# EAGLE board usb-sanitizer-double (EAGLE 7.2.0)
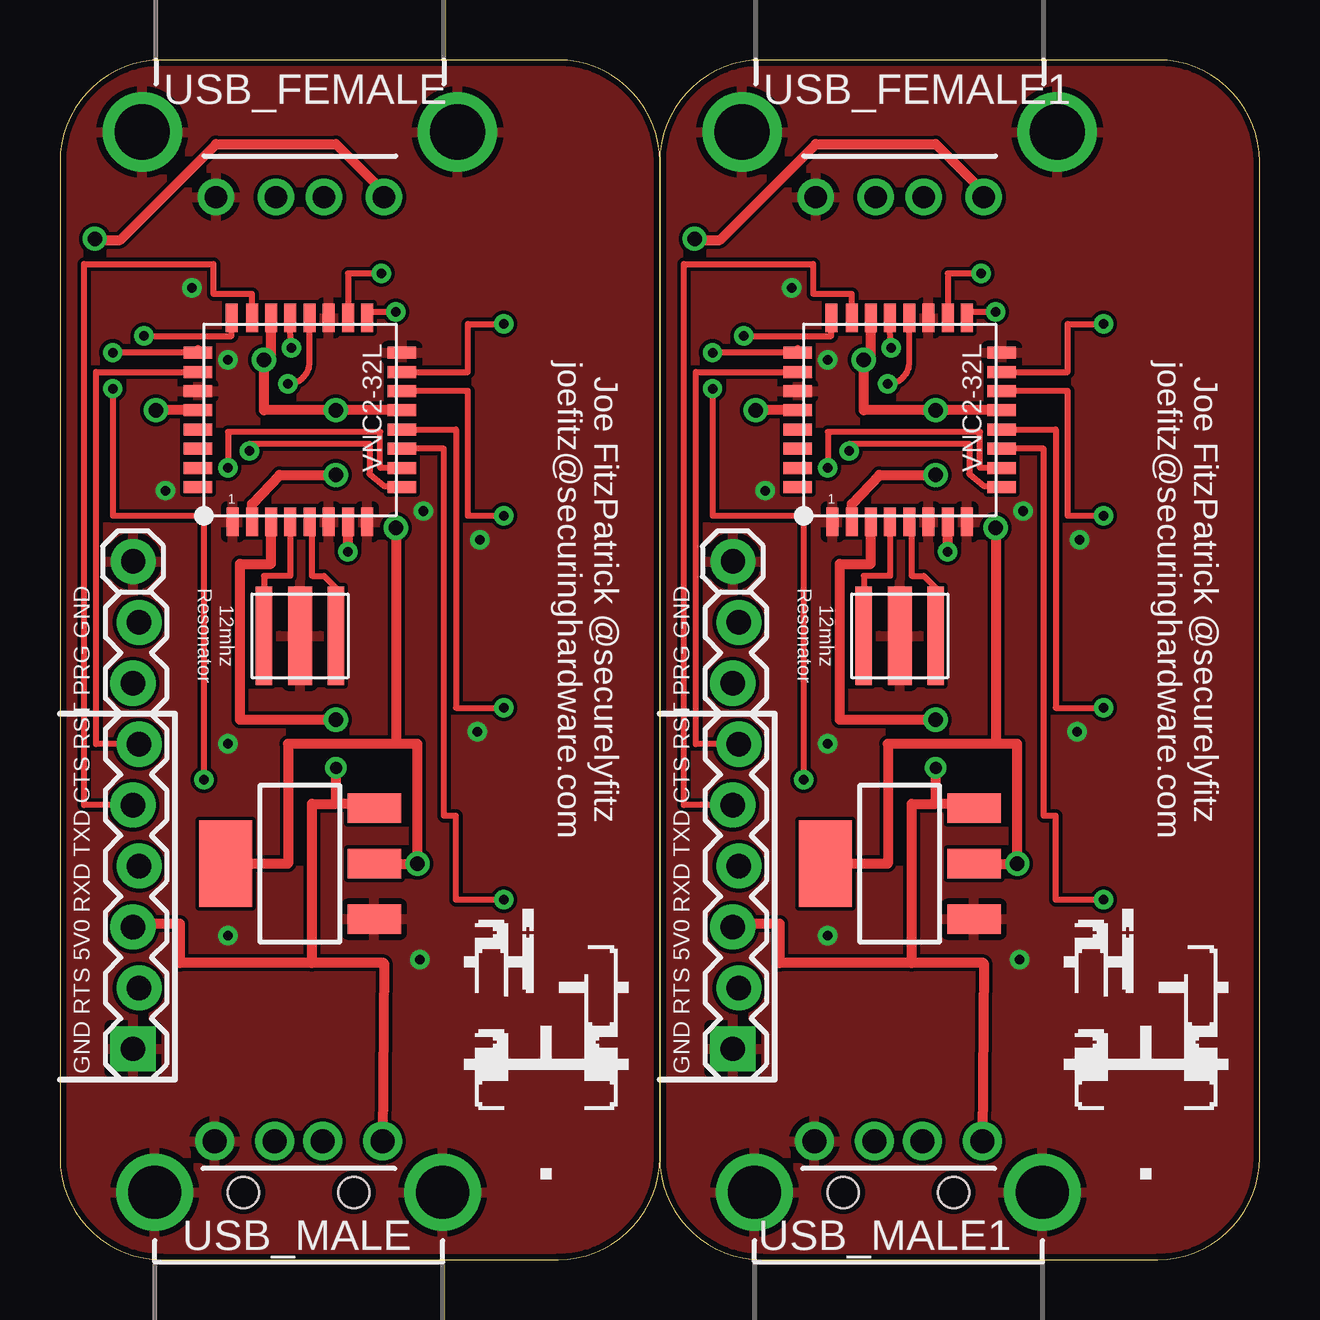
[diagram p0: board, top side]
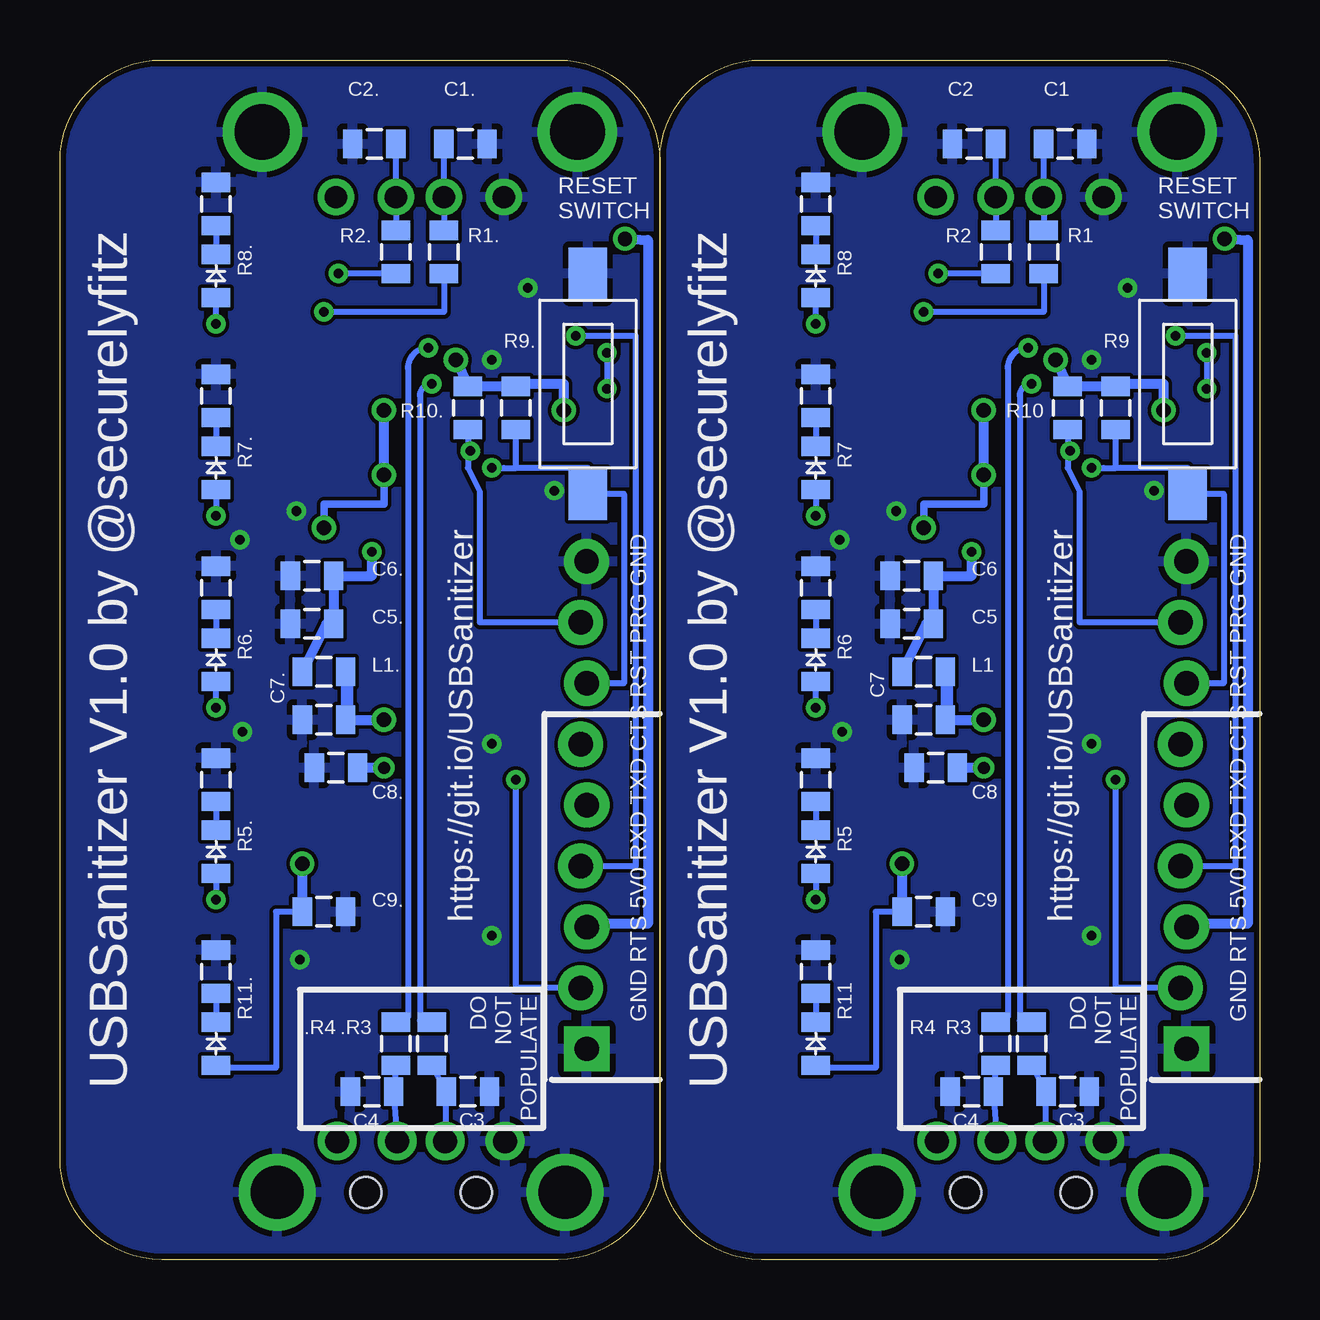
[diagram p1: board, bottom side, seen from below]

Size 50 x 50 mm. Coordinates in mm from the lower left corner, seen from the top.
Outline: 25,4.24 arc-90 20.76,0 4.24,0 arc-90 0,4.24 0,45.76 arc-90 4.24,50 20.76,50 arc-90 25,45.76
Outline: 25,4.24 25,45.76
Outline: 25,45.76 25,4.24
Outline: 25,4.24 arc90 29.24,0 45.76,0 arc90 50,4.24 50,45.76 arc90 45.76,50 29.24,50 arc90 25,45.76
Copper layers (1*16): Top 0.035mm / dielectric 1.5mm / Bottom 0.035mm
Design rules "DFRobot_Eagle_Rule_v0.4 *": minimum track width 6mil, minimum drill 12mil, track to track 6mil, track to pad 6mil, pad to pad 6mil, via to via 6mil, smd to smd 0mil, copper to edge 10mil, drill to drill 10mil, minimum pad ring 12mil, minimum via ring 8mil, stop-mask expansion 2mil, vias tented up to drill 25mil, thermal gap 10mil

## Footprints (pad centres in the part's own frame; a part is rotated, then mirrored left to right if it is on the bottom)
0805 = smd 0.8 x 1.2: 1 -0.9,0; 2 0.9,0
SOT223 = smd 1.219 x 2.235: 1 -2.311,-3.099; 2 0,-3.099; 3 2.311,-3.099 | smd 3.6 x 2.2: 4 0,3.099
1X08_LOCK = drill 1.016 pad 1.88 square: 1 0,0.127 | drill 1.016 pad 1.88: 2 2.54,-0.127; 3 5.08,0.127; 4 7.62,-0.127; 5 10.16,0.127; 6 12.7,-0.127; 7 15.24,0.127; 8 17.78,-0.127
1X01 = drill 1.016 pad 1.88: 1 0,0
QFP32 = smd 0.5 x 1.2: P$1 -2.8,-4.25; P$2 -2,-4.25; P$3 -1.2,-4.25; P$4 -0.4,-4.25; P$5 0.4,-4.25; P$6 1.2,-4.25; P$7 2,-4.25; P$8 2.8,-4.25; P$17 2.8,4.25; P$18 2,4.25; P$19 1.2,4.25; P$20 0.4,4.25; P$21 -0.4,4.25; P$22 -1.2,4.25; P$23 -2,4.25; P$24 -2.85,4.25 | smd 1.2 x 0.5: P$9 4.25,-2.8; P$10 4.25,-2; P$11 4.25,-1.2; P$12 4.25,-0.4; P$13 4.25,0.4; P$14 4.25,1.2; P$15 4.25,2; P$16 4.25,2.8; P$25 -4.25,2.8; P$26 -4.25,2; P$27 -4.25,1.2; P$28 -4.25,0.4; P$29 -4.25,-0.4; P$30 -4.25,-1.2; P$31 -4.25,-2; P$32 -4.25,-2.8
RESONATOR = smd 1 x 4.1: GND 0,0 | smd 0.7 x 4.1: XIN -1.5,0; XOUT 1.5,0
SWITCH = smd 2.18 x 1.6: P$1 -4.59,0; P$2 4.59,0
USB-A-F = drill 0.92: D+ 2.71,-1; D- 2.71,1; GND 2.71,-3.5; VBUS 2.71,3.5 | drill 2.3: GND2 0,-6.57; GND3 0,6.57
USB-A-M = drill 1: D+ 2.13,1; D- 2.13,-1; GND 2.13,3.5; VBUS 2.13,-3.5 | drill 2.2: GND2 0,-6; GND3 0,6 | hole 1.3: 0,2.3; 0,-2.3

## Placement (x,y rotation side)
.C3  47pF  [0805]  33,7 0 bottom
.C4  47pF  [0805]  37,7 180 bottom
.R3  27  [0805]  34.5,9 270 bottom
.R4  27  [0805]  36,9 270 bottom
C1  47pF  [0805]  8.1,46.5 0 bottom
C1.  47pF  [0805]  33.1,46.5 0 bottom
C2  47pF  [0805]  11.9,46.5 180 bottom
C2.  47pF  [0805]  36.9,46.5 180 bottom
C3  47pF  [0805]  8,7 0 bottom
C4  47pF  [0805]  12,7 180 bottom
C5  4.7uF  [0805]  14.5,26.5 180 bottom
C5.  4.7uF  [0805]  39.5,26.5 180 bottom
C6  100nF  [0805]  14.5,28.5 180 bottom
C6.  100nF  [0805]  39.5,28.5 180 bottom
C7  100nF  [0805]  14,22.5 180 bottom
C7.  100nF  [0805]  39,22.5 180 bottom
C8  10uF  [0805]  13.5,20.5 180 bottom
C8.  10uF  [0805]  38.5,20.5 180 bottom
C9  22uF  [0805]  14,14.5 0 bottom
C9.  22uF  [0805]  39,14.5 0 bottom
D1  READY  [0805]  18.5,17 90 bottom
D2  ERASE  [0805]  18.5,25 90 bottom
D3  GOOD  [0805]  18.5,33 90 bottom
D4  BAD  [0805]  18.5,41 90 bottom
D5  POWER  [0805]  18.5,9 90 bottom
D6  READY  [0805]  43.5,17 90 bottom
D7  ERASE  [0805]  43.5,25 90 bottom
D8  GOOD  [0805]  43.5,33 90 bottom
D9  BAD  [0805]  43.5,41 90 bottom
D10  POWER  [0805]  43.5,9 90 bottom
IC1  1117-33  [SOT223]  10,16.5 90 top
IC2  1117-33  [SOT223]  35,16.5 90 top
JP1  PROG  [1X08_LOCK]  3.17,8.78 90 top
JP2  GNDCON  [1X01]  3.05,29.1 0 top
JP3  PROG  [1X08_LOCK]  28.17,8.78 90 top
JP4  GNDCON  [1X01]  28.05,29.1 0 top
L1  600R  [0805]  14,24.5 180 bottom
L1.  600R  [0805]  39,24.5 180 bottom
R1  27  [0805]  9,42 90 bottom
R1.  27  [0805]  34,42 90 bottom
R2  27  [0805]  11,42 90 bottom
R2.  27  [0805]  36,42 90 bottom
R3  27  [0805]  9.5,9 270 bottom
R4  27  [0805]  11,9 270 bottom
R5  100  [0805]  18.5,20 90 bottom
R5.  100  [0805]  43.5,20 90 bottom
R6  100  [0805]  18.5,28 90 bottom
R6.  100  [0805]  43.5,28 90 bottom
R7  100  [0805]  18.5,36 90 bottom
R7.  100  [0805]  43.5,36 90 bottom
R8  100  [0805]  18.5,44 90 bottom
R8.  100  [0805]  43.5,44 90 bottom
R9  47k  [0805]  6,35.5 270 bottom
R9.  47k  [0805]  31,35.5 270 bottom
R10  47k  [0805]  8,35.5 270 bottom
R10.  47k  [0805]  33,35.5 270 bottom
R11  100  [0805]  18.5,12 90 bottom
R11.  100  [0805]  43.5,12 90 bottom
U$1  VNC2  [QFP32]  10,35 0 top
U$2  [SH-HALFINCH]  16,15 270 top
U$3  [OSHW]  18.5,47 270 top
U$4  RESONATOR  [RESONATOR]  10,26 0 top
U$5  SWITCH  [SWITCH]  3,36.5 90 bottom
U$6  VNC2  [QFP32]  35,35 0 top
U$7  RESONATOR  [RESONATOR]  35,26 0 top
U$8  [SH-HALFINCH]  41,15 270 top
U$9  [OSHW]  43.5,47 270 top
U$10  SWITCH  [SWITCH]  28,36.5 90 bottom
USB_FEMALE  USB_AF  [USB-A-F]  10,47 270 top
USB_FEMALE1  USB_AF  [USB-A-F]  35,47 270 top
USB_MALE  USB_AM  [USB-A-M]  9.95,2.8 90 top
USB_MALE1  USB_AM  [USB-A-M]  34.95,2.8 90 top

## Library data of the parts
.C3 .C4 .R3 .R4 C1 C1. C2 C2. C3-C5 C5. C6 C6. C7 C7. C8 C8. C9 C9. L1 L1. R1 R1. R2 R2. R3-R5 R5. R6 R6. R7 R7. R8 R8. R9 R9. R10 R10. R11 R11. = SparkFun-Passives
D1-D10 U$1 U$4-U$7 U$10 USB_FEMALE USB_FEMALE1 USB_MALE USB_MALE1 = vinivulum
IC1 IC2 = SparkFun-PowerIC; PROD_ID: VREG-08170
JP1-JP4 = SparkFun-Connectors
U$2 U$8 = securinghardware
U$3 U$9 = oshw

## Nets
3.3V: C9.1 D5.1 IC1.2 IC1.4 R9.1 R10.1 U$1.P$2 U$1.P$13 U$1.P$22 U$1.P$28
3.3V1: C9..1 D10.1 IC2.2 IC2.4 R9..1 R10..1 U$6.P$2 U$6.P$13 U$6.P$22 U$6.P$28
5V: C8.1 IC1.3 JP1.3 USB_FEMALE.VBUS USB_MALE.VBUS
5V1: C8..1 IC2.3 JP3.3 USB_FEMALE1.VBUS USB_MALE1.VBUS
GND: C1.2 C2.2 C3.2 C4.2 C5.2 C6.2 C7.2 C8.2 C9.2 IC1.1 JP1.1 JP2.1 R5.2 R6.2 R7.2 R8.2 R11.2 U$1.P$1 U$1.P$6 U$1.P$8 U$1.P$16 U$1.P$19 U$1.P$27 U$4.GND U$5.P$2 USB_FEMALE.GND USB_FEMALE.GND2 USB_FEMALE.GND3 USB_MALE.GND USB_MALE.GND2 USB_MALE.GND3
GND1: .C3.2 .C4.2 C1..2 C2..2 C5..2 C6..2 C7..2 C8..2 C9..2 IC2.1 JP3.1 JP4.1 R5..2 R6..2 R7..2 R8..2 R11..2 U$6.P$1 U$6.P$6 U$6.P$8 U$6.P$16 U$6.P$19 U$6.P$27 U$7.GND U$10.P$2 USB_FEMALE1.GND USB_FEMALE1.GND2 USB_FEMALE1.GND3 USB_MALE1.GND USB_MALE1.GND2 USB_MALE1.GND3
N$1: C5..1 C6..1 L1..2 U$6.P$7
N$2: C7..1 L1..1 U$6.P$3
N$3: U$6.P$5 U$7.XOUT
N$4: U$6.P$4 U$7.XIN
N$5: JP3.2 U$6.P$25
N$6: JP3.4 U$6.P$24
N$7: JP3.5 U$6.P$23
N$8: JP3.6 U$6.P$26
N$9: D5.2 R11.1
N$10: C5.1 C6.1 L1.2 U$1.P$7
N$11: C7.1 L1.1 U$1.P$3
N$12: JP3.8 R10..2 U$6.P$9
N$13: U$1.P$5 U$4.XOUT
N$14: U$1.P$4 U$4.XIN
N$15: JP1.2 U$1.P$25
N$16: JP1.4 U$1.P$24
N$17: JP1.5 U$1.P$23
N$18: JP1.6 U$1.P$26
N$19: JP3.7 R9..2 U$6.P$10 U$10.P$1
N$20: JP1.8 R10.2 U$1.P$9
N$21: JP1.7 R9.2 U$1.P$10 U$5.P$1
N$22: D1.2 R5.1
N$23: D2.2 R6.1
N$24: D4.2 R8.1
N$25: D3.2 R7.1
N$26: D1.1 U$1.P$11
N$27: D2.1 U$1.P$12
N$28: D3.1 U$1.P$14
N$29: D4.1 U$1.P$15
N$30: D6.2 R5..1
N$31: D7.2 R6..1
N$32: D9.2 R8..1
N$33: D8.2 R7..1
N$34: D6.1 U$6.P$11
N$35: D7.1 U$6.P$12
N$36: D8.1 U$6.P$14
N$37: D9.1 U$6.P$15
N$38: D10.2 R11..1
USB1DM: R2.1 U$1.P$18
USB1DM1: R2..1 U$6.P$18
USB1DP: R1.1 U$1.P$17
USB1DP1: R1..1 U$6.P$17
USB1RDM: C2.1 R2.2 USB_FEMALE.D-
USB1RDM1: C2..1 R2..2 USB_FEMALE1.D-
USB1RDP: C1.1 R1.2 USB_FEMALE.D+
USB1RDP1: C1..1 R1..2 USB_FEMALE1.D+
USB2DM: R4.1 U$1.P$21
USB2DM1: .R4.1 U$6.P$21
USB2DP: R3.1 U$1.P$20
USB2DP1: .R3.1 U$6.P$20
USB2RDM: C4.1 R4.2 USB_MALE.D-
USB2RDM1: .C4.1 .R4.2 USB_MALE1.D-
USB2RDP: C3.1 R3.2 USB_MALE.D+
USB2RDP1: .C3.1 .R3.2 USB_MALE1.D+

## Tracks (layer width: path | path; a pad name or v marks a point on that pad's centre or on a via)
3.3V  (via drill 0.6)
  Top 0.406: U$1.P$13 v11.5,35.4 8.5,35.4 v8.5,37.5 8.8,37.5 U$1.P$22 | U$1.P$28 v4,35.4 | v14,30.5 14,21.5 | 14,21.5 9.5,21.5 9.5,16.5 IC1.4 | IC1.2 v14.9,16.5 14.9,21.5 14,21.5 | U$1.P$2 8,31.5 9.15,32.7 v11.5,32.7
  Bottom 0.254: C9.1 16,14.5 16,8 18.5,8 D5.1
  Bottom 0.305: v14,30.5 14,31.5 11.5,31.5 v11.5,32.7
  Bottom 0.406: v14.9,16.5 C9.1 | v8.5,37.5 R10.1 R9.1 6,36.5 4,36.5 v4,35.4 | v11.5,32.7 v11.5,35.4
3.3V1  (via drill 0.6)
  Top 0.406: U$6.P$13 v36.5,35.4 33.5,35.4 v33.5,37.5 33.8,37.5 U$6.P$22 | U$6.P$28 v29,35.4 | v39,30.5 39,21.5 | 39,21.5 34.5,21.5 34.5,16.5 IC2.4 | IC2.2 v39.9,16.5 39.9,21.5 39,21.5 | U$6.P$2 33,31.5 34.15,32.7 v36.5,32.7
  Bottom 0.254: C9..1 41,14.5 41,8 43.5,8 D10.1
  Bottom 0.305: v39,30.5 39,31.5 36.5,31.5 v36.5,32.7
  Bottom 0.406: v39.9,16.5 C9..1 | v33.5,37.5 R10..1 R9..1 31,36.5 29,36.5 v29,35.4 | v36.5,32.7 v36.5,35.4
5V  (via drill 0.5, 0.6)
  Top 0.406: USB_MALE.VBUS 13.5,12.36 10.5,12.36 | 10.5,12.36 10.5,19 11.5,19 | IC1.3 12.6,19 11.5,19 | 11.5,19 v11.5,20.5 | 10.5,12.36 5,12.36 5,14 3.04,14 JP1.3 | v1.45,42.55 1.5,42.5 2.5,42.5 6.5,46.5 11.5,46.5 13.5,44.5 USB_FEMALE.VBUS
  Bottom 0.406: v11.5,20.5 C8.1 | JP1.3 3.04,14 0.5,14 0.5,42.5 v1.45,42.55
5V1  (via drill 0.5, 0.6)
  Top 0.406: USB_MALE1.VBUS 38.5,12.36 35.5,12.36 | 35.5,12.36 35.5,19 36.5,19 | IC2.3 37.6,19 36.5,19 | 36.5,19 v36.5,20.5 | 35.5,12.36 30,12.36 30,14 28.04,14 JP3.3 | v26.45,42.55 26.5,42.5 27.5,42.5 31.5,46.5 36.5,46.5 38.5,44.5 USB_FEMALE1.VBUS
  Bottom 0.406: v36.5,20.5 C8..1 | JP3.3 28.04,14 25.5,14 25.5,42.5 v26.45,42.55
GND  (via drill 0.4)
  other vias: 17.5,30 17.4,22 5.5,40.5 7,21.5 7,13.5 15.15,31.2 7,37.5 15,12.5 4.4,32.05
  pour Bottom: 0,0 25,0 25,50 0,50
  pour Top: 0,0 25,0 25,50 0,50
GND1  (via drill 0.4)
  other vias: 42.5,30 42.4,22 30.5,40.5 32,21.5 32,13.5 40.15,31.2 32,37.5 40,12.5 29.4,32.05
  pour Bottom: 25,0 50,0 50,50 25,50
  pour Top: 25,0 50,0 50,50 25,50
N$1  (via drill 0.4)
  Top 0.406: v37,29.5 U$6.P$7
  Bottom 0.406: L1..2 38.9,26.5 C5..1 C6..1 37,28.5 v37,29.5
N$2  (via drill 0.6)
  Top 0.406: v36.5,22.5 32.5,22.5 32.5,29 33.8,29 U$6.P$3
  Bottom 0.406: C7..1 L1..1 38,24.5 38,22.5 v36.5,22.5
N$3
  Top 0.254: U$6.P$5 35.5,30.75 35.5,28.5 36,28.5 36.5,28 U$7.XOUT
N$4
  Top 0.254: U$6.P$4 34.6,28.5 33.5,28.5 U$7.XIN
N$5  (via drill 0.4)
  Top 0.254: 30.75,38 U$6.P$25 v27.2,37.8 | v31,20 31,31 27.2,31 v27.2,36.3
  Bottom 0.254: JP3.2 31,11.32 v31,20 | v27.2,37.8 v27.2,36.3
N$6  (via drill 0.4)
  Top 0.254: v28.5,38.5 32.15,38.5 U$6.P$24
  Bottom 0.254: JP3.4 26,16.4 26,38.5 v28.5,38.5
N$7
  Top 0.254: JP3.5 26,18.94 26,41.5 31.4,41.5 31.4,40.25 33,40.25 U$6.P$23
N$8
  Top 0.254: JP3.6 26.5,21.48 26.5,37 U$6.P$26
N$9
  Bottom 0.254: R11.1 D5.2
N$10  (via drill 0.4)
  Top 0.406: v12,29.5 U$1.P$7
  Bottom 0.406: L1.2 13.9,26.5 C5.1 C6.1 12,28.5 v12,29.5
N$11  (via drill 0.6)
  Top 0.406: v11.5,22.5 7.5,22.5 7.5,29 8.8,29 U$1.P$3
  Bottom 0.406: C7.1 L1.1 13,24.5 13,22.5 v11.5,22.5
N$12  (via drill 0.4)
  Top 0.254: v32.9,33.7 32.9,34 37.9,34 37.9,32.75 38.5,32.25 39.2,32.25 U$6.P$9
  Bottom 0.254: R10..2 33,33.8 v32.9,33.7 33,33.7 33,33 32.5,32 32.5,26.56 JP3.8
N$13
  Top 0.254: U$1.P$5 10.5,30.75 10.5,28.5 11,28.5 11.5,28 U$4.XOUT
N$14
  Top 0.254: U$1.P$4 9.6,28.5 8.5,28.5 U$4.XIN
N$15  (via drill 0.4)
  Top 0.254: 5.75,38 U$1.P$25 v2.2,37.8 | v6,20 6,31 2.2,31 v2.2,36.3
  Bottom 0.254: JP1.2 6,11.32 v6,20 | v2.2,37.8 v2.2,36.3
N$16  (via drill 0.4)
  Top 0.254: v3.5,38.5 7.15,38.5 U$1.P$24
  Bottom 0.254: JP1.4 1,16.4 1,38.5 v3.5,38.5
N$17
  Top 0.254: JP1.5 1,18.94 1,41.5 6.4,41.5 6.4,40.25 8,40.25 U$1.P$23
N$18
  Top 0.254: JP1.6 1.5,21.48 1.5,37 U$1.P$26
N$19  (via drill 0.4)
  Top 0.254: U$6.P$10 38.35,33 38.35,34.5 32,34.5 v32,33
  Bottom 0.254: v32,33 31.5,33 31,33 | 31,33 R9..2 | JP3.7 26.5,24.02 26.5,31.91 U$10.P$1 28,33 31,33
N$20  (via drill 0.4)
  Top 0.254: v7.9,33.7 7.9,34 12.9,34 12.9,32.75 13.5,32.25 14.2,32.25 U$1.P$9
  Bottom 0.254: R10.2 8,33.8 v7.9,33.7 8,33.7 8,33 7.5,32 7.5,26.56 JP1.8
N$21  (via drill 0.4)
  Top 0.254: U$1.P$10 13.35,33 13.35,34.5 7,34.5 v7,33
  Bottom 0.254: v7,33 6.5,33 6,33 | 6,33 R9.2 | JP1.7 1.5,24.02 1.5,31.91 U$5.P$1 3,33 6,33
N$22
  Bottom 0.254: R5.1 D1.2
N$23
  Bottom 0.254: R6.1 D2.2
N$24
  Bottom 0.254: R8.1 D4.2
N$25
  Bottom 0.254: R7.1 D3.2
N$26  (via drill 0.4)
  Top 0.254: U$1.P$11 16,33.8 16,19 16,18.5 16.5,18.5 16.5,15 v18.5,15
  Bottom 0.254: D1.1 v18.5,15
N$27  (via drill 0.4)
  Top 0.254: U$1.P$12 16.5,34.6 16.5,23 v18.5,23
  Bottom 0.254: v18.5,23 D2.1
N$28  (via drill 0.4)
  Top 0.254: v18.5,31 17,31 17,36.2 U$1.P$14
  Bottom 0.254: D3.1 v18.5,31
N$29  (via drill 0.4)
  Top 0.254: U$1.P$15 17,37 17,39 v18.5,39
  Bottom 0.254: v18.5,39 D4.1
N$30
  Bottom 0.254: R5..1 D6.2
N$31
  Bottom 0.254: R6..1 D7.2
N$32
  Bottom 0.254: R8..1 D9.2
N$33
  Bottom 0.254: R7..1 D8.2
N$34  (via drill 0.4)
  Top 0.254: U$6.P$11 41,33.8 41,19 41,18.5 41.5,18.5 41.5,15 v43.5,15
  Bottom 0.254: D6.1 v43.5,15
N$35  (via drill 0.4)
  Top 0.254: U$6.P$12 41.5,34.6 41.5,23 v43.5,23
  Bottom 0.254: v43.5,23 D7.1
N$36  (via drill 0.4)
  Top 0.254: v43.5,31 42,31 42,36.2 U$6.P$14
  Bottom 0.254: D8.1 v43.5,31
N$37  (via drill 0.4)
  Top 0.254: U$6.P$15 42,37 42,39 v43.5,39
  Bottom 0.254: v43.5,39 D9.1
N$38
  Bottom 0.254: R11..1 D10.2
USB1DM  (via drill 0.4)
  Top 0.254: v13.4,41.1 12,41.1 U$1.P$18
  Bottom 0.254: R2.1 v13.4,41.1
USB1DM1  (via drill 0.4)
  Top 0.254: v38.4,41.1 37,41.1 U$6.P$18
  Bottom 0.254: R2..1 v38.4,41.1
USB1DP  (via drill 0.4)
  Top 0.254: v14,39.5 12.8,39.5 U$1.P$17
  Bottom 0.254: R1.1 9,39.5 v14,39.5
USB1DP1  (via drill 0.4)
  Top 0.254: v39,39.5 37.8,39.5 U$6.P$17
  Bottom 0.254: R1..1 34,39.5 v39,39.5
USB1RDM
  Bottom 0.254: C2.1 USB_FEMALE.D- R2.2
USB1RDM1
  Bottom 0.254: C2..1 USB_FEMALE1.D- R2..2
USB1RDP
  Bottom 0.254: C1.1 USB_FEMALE.D+ R1.2
USB1RDP1
  Bottom 0.254: C1..1 USB_FEMALE1.D+ R1..2
USB2DM  (via drill 0.4)
  Top 0.254: U$1.P$21 arc90 9.5,39.15 v9.65,38
  Bottom 0.254: v9.65,38 arc-90 10.5,37.15 10.5,10.1 R4.1
USB2DM1  (via drill 0.4)
  Top 0.254: U$6.P$21 arc90 34.5,39.15 v34.65,38
  Bottom 0.254: v34.65,38 arc-90 35.5,37.15 35.5,10.1 .R4.1
USB2DP  (via drill 0.4)
  Top 0.254: v9.5,36.5 arc90 10.4,37.4 U$1.P$20
  Bottom 0.254: v9.5,36.5 arc-90 10,36 10,9.95 R3.1
USB2DP1  (via drill 0.4)
  Top 0.254: v34.5,36.5 arc90 35.4,37.4 U$6.P$20
  Bottom 0.254: v34.5,36.5 arc-90 35,36 35,9.95 .R3.1
USB2RDM
  Bottom 0.254: R4.2 C4.1 USB_MALE.D-
USB2RDM1
  Bottom 0.254: .R4.2 .C4.1 USB_MALE1.D-
USB2RDP
  Bottom 0.254: USB_MALE.D+ 8.9,4.93 C3.1 R3.2
USB2RDP1
  Bottom 0.254: USB_MALE1.D+ 33.9,4.93 .C3.1 .R3.2

## Text on the board
tNames: VNC2-32L | VNC2-32L | 1 | 1 | Joe FitzPatrick @securelyfitz / joefitz@securinghardware.com | Joe FitzPatrick @securelyfitz / joefitz@securinghardware.com | 12mhz / Resonator | 12mhz / Resonator | GND RTS 5V0 RXD TXD CTS RST PRG GND | GND RTS 5V0 RXD TXD CTS RST PRG GND
bNames: RESET / SWITCH | RESET / SWITCH | GND RTS 5V0 RXD TXD CTS RST PRG GND | GND RTS 5V0 RXD TXD CTS RST PRG GND | USBSanitizer V1.0 by @securelyfitz | USBSanitizer V1.0 by @securelyfitz | https://git.io/USBSanitizer | https://git.io/USBSanitizer | DO / NOT / POPULATE | DO / NOT / POPULATE